# Altium PCB PCB1.PcbDoc
Units mm, origin at the board's own origin, x right, y up, seen from the top; angles counter-clockwise.
Board outline 55.63 x 70.87 mm, 2 copper layers (Top Layer, Bottom Layer); 17 components, 18 nets, 84 pads, 0 vias.
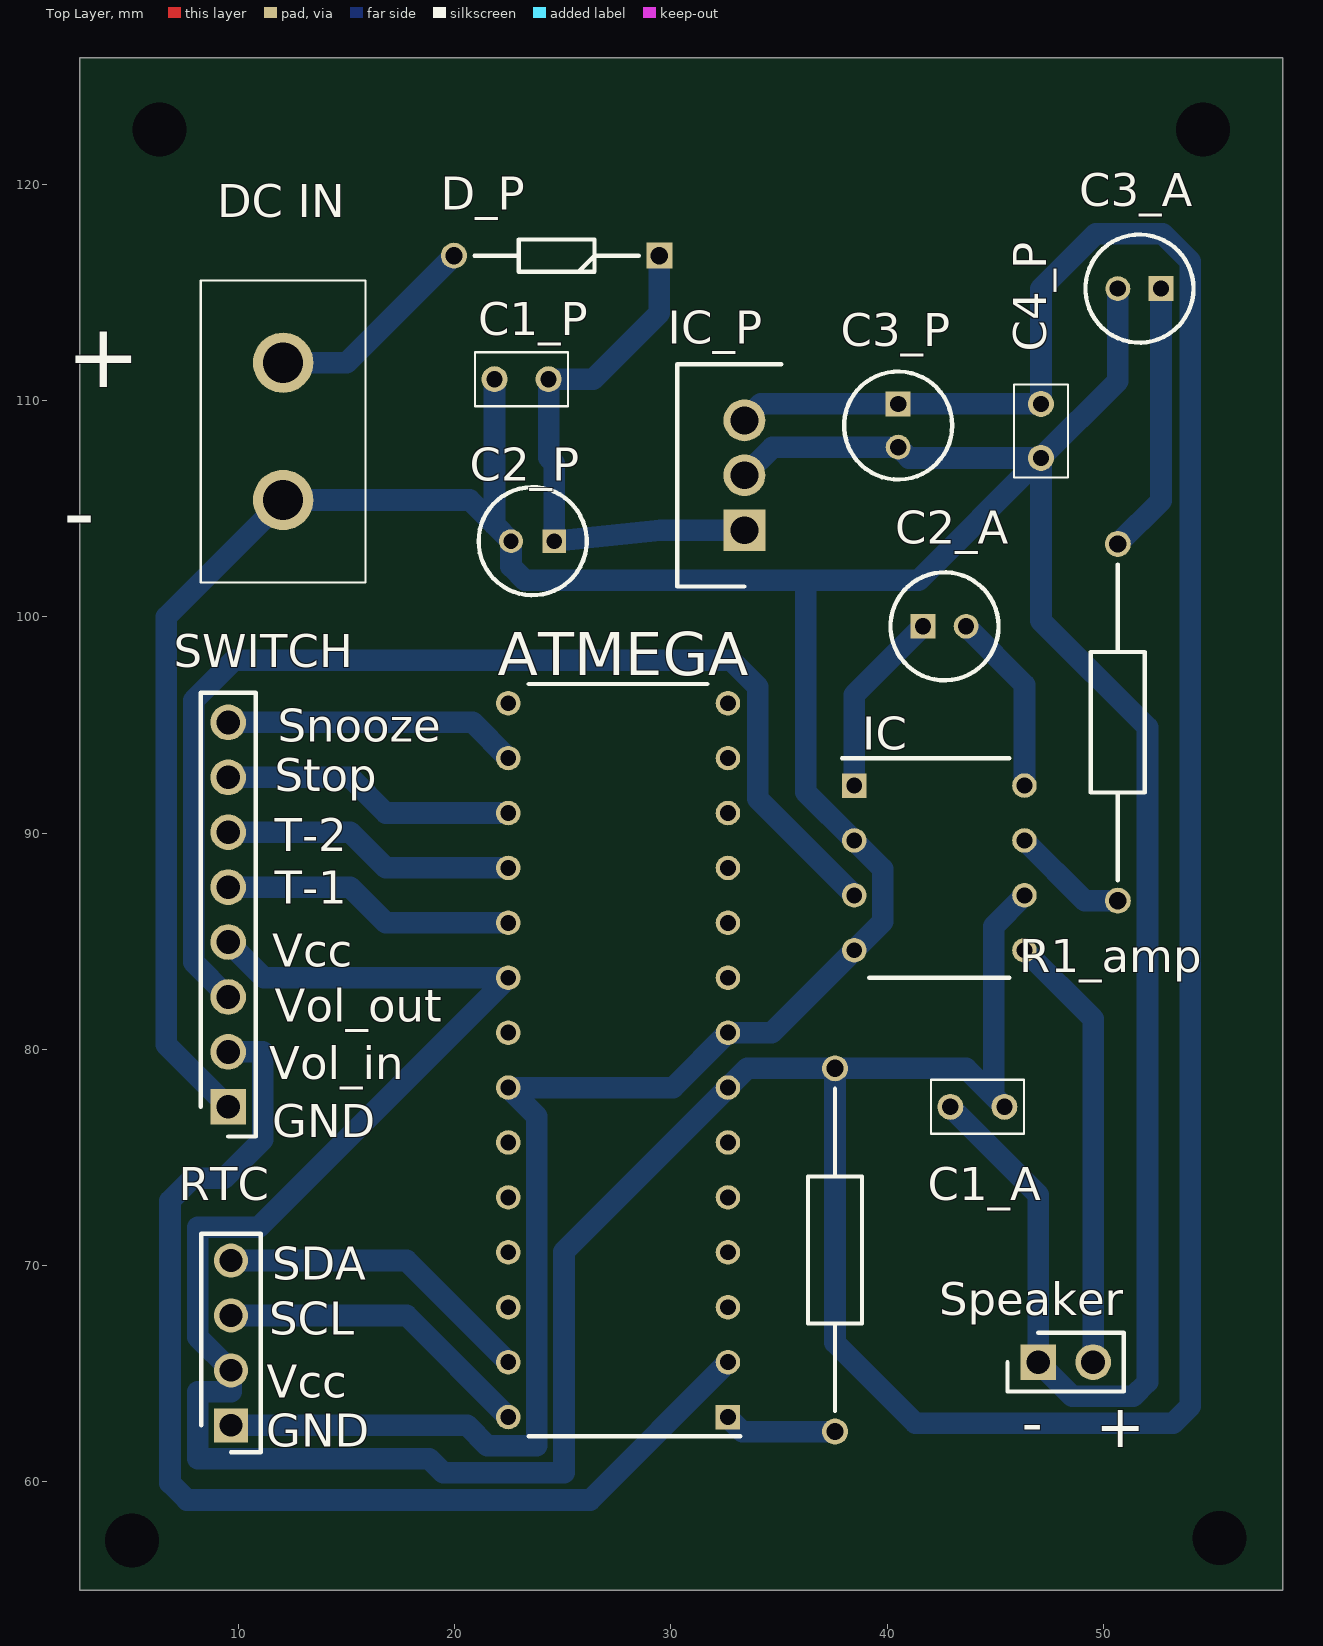
[diagram p0: Top Layer view]
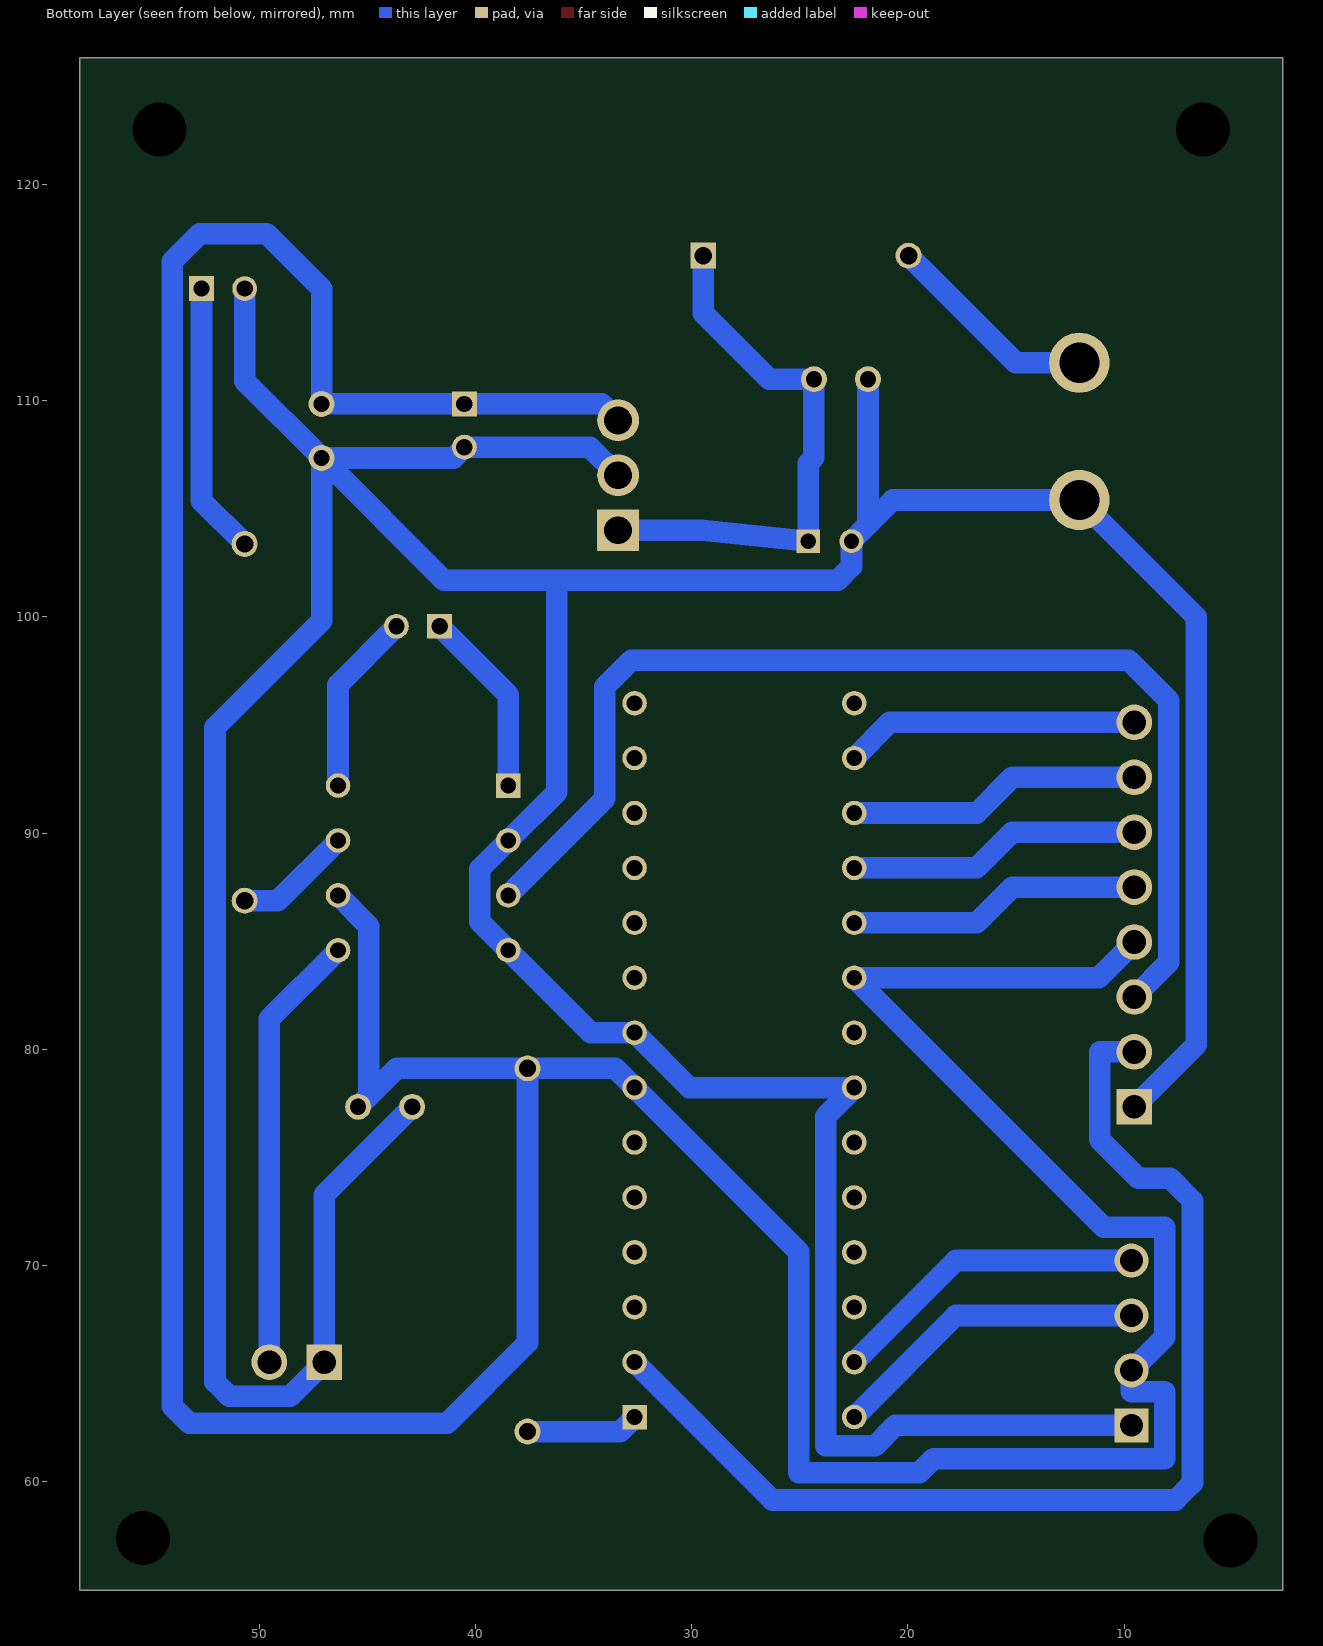
[diagram p1: Bottom Layer view, seen from below]
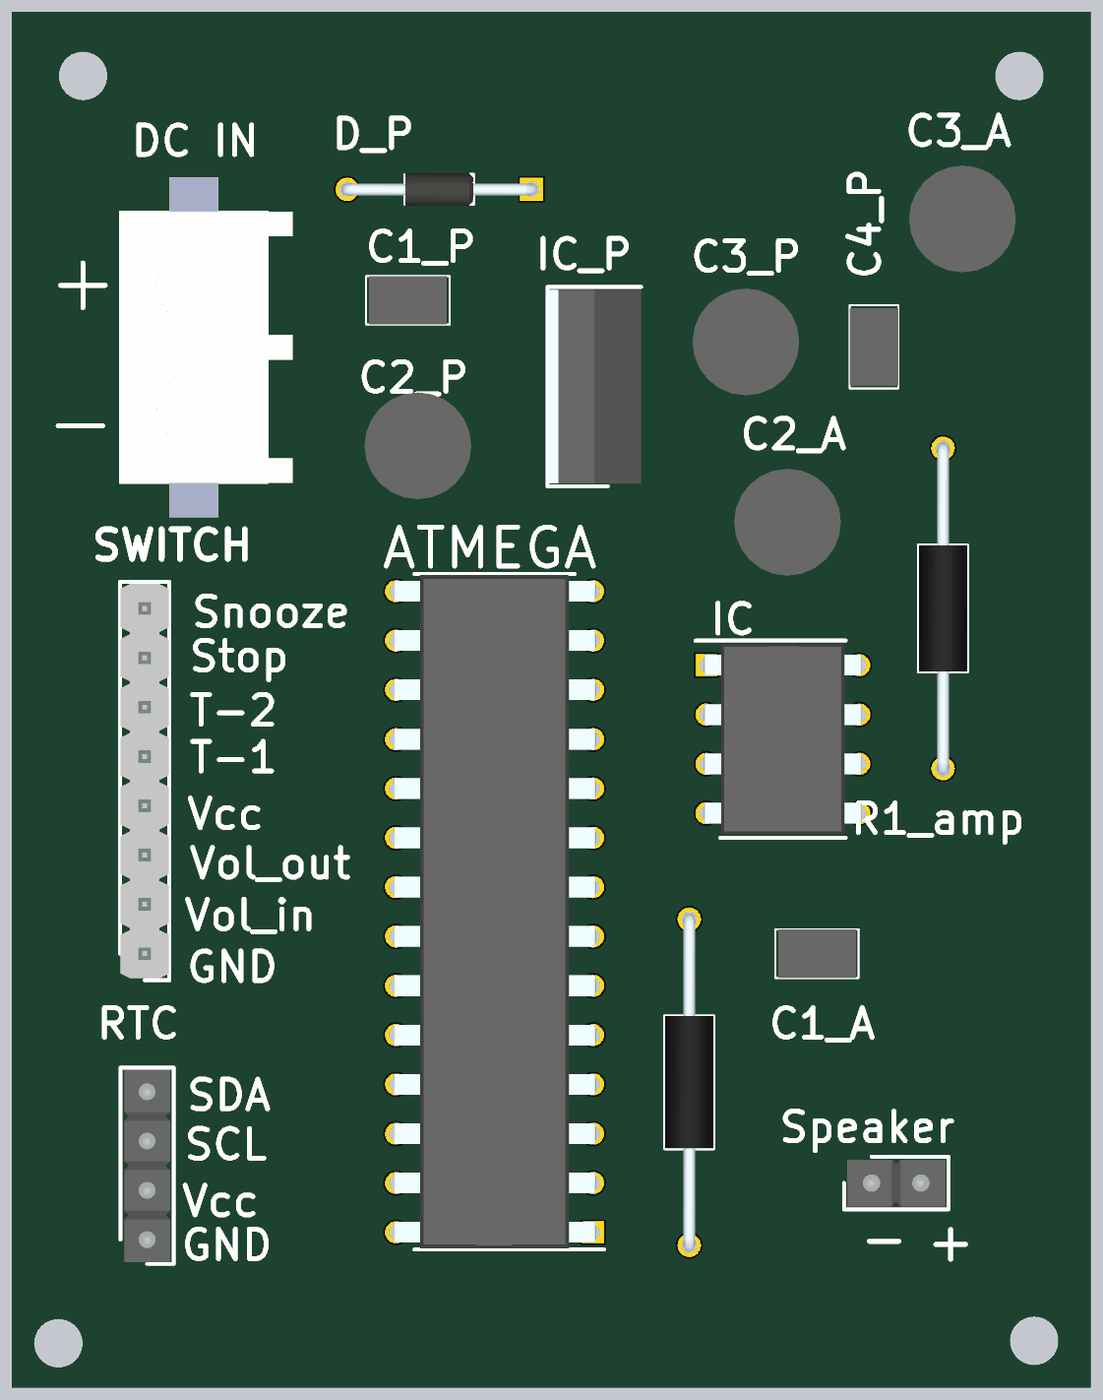
[diagram p2: 3D render of the assembled board from above, using the file's embedded part models]

## Layer stack, top to bottom
Top Solder: solder mask 0.0102, Solder Resist, Dk 3.5
Top Layer: signal copper 0.0356
Dielectric 1: dielectric 0.32, FR-4, Dk 4.8
Bottom Layer: signal copper 0.0356
Bottom Solder: solder mask 0.0102, Solder Resist, Dk 3.5

## Board outline
2.667,54.991 58.293,54.991 58.293,125.857 2.667,125.857

## Design rules (kind name [scope] priority, off if disabled: settings)
Clearance [All] p1: gap=0.254 ignorepadtopadclearanceinfootprint=FALSE except(0: Arc-Hole Track-Hole SMDPad-Hole THPad-Hole Via-Hole Fill-Hole Poly-Hole Region-Hole Text-Hole)
PolygonConnect [All] p1: connectstyle=Relief reliefconductorwidth=0.254 reliefentries=4 polygonreliefangle="90 Angle" airgapwidth=0.254
RoutingVias [All] p1: holewidth=0.711 width=1.27 viastyle="Through Hole" minholewidth=0.711 minwidth=1.27 maxholewidth=0.711 maxwidth=1.27
SolderMaskExpansion [All] p1: expansion=0.102 istentingtop=FALSE
Width [All] p1: maxlimit=2 minlimit=1 preferedwidth=1
30 further rules are at their usual default settings.

## Classes and differential pairs
component class Schematic_Alarm_tone: ATMEGA C1_A C1_P C2_A C2_P C3_A C3_P C4_P D_P "DC IN" IC IC_P R1_amp RTC Speaker SWITCH

## Components (designator, comment, footprint, x,y, rotation, side; value= is the part's Value field where it differs from the comment)
ATMEGA "ATMEGA328-PU" DIP1016W53P254L3468H457Q28N 27.559,79.502 r180 top (schematic designator ATMEGA328-PU)
C1_A "0.1uF" RCE5C1H103J1A2H03B 45.426,77.343 r180 top
C1_P "0.22uF" CAPPRD200W52D500H1250 24.606,103.505 r180 top
C2_A "10uF" CAPPRD200W55D500H1250 41.656,99.568 r0 top
C2_P "0.1uF" RCE5C1H103J1A2H03B 24.344,110.998 r180 top
C3_A "10uF" CAPPRD200W55D500H1250 52.673,115.189 r180 top
C3_P "10uF" CAPPRD200W55D500H1250 40.513,109.855 r270 top
C4_P "0.1uF" RCE5C1H103J1A2H03B 47.117,109.855 r270 top
D_P "SD103A-TR" DIOAD950W60L350D150 29.464,116.713 r180 top
"DC IN" "0010845020" 0010845020 12.065,105.41 r90 top
IC "LM386N" DIP787W53P254L982H508Q8N 42.418,88.392 r0 top
IC_P "7805" TO254P482X997X2018-3P 33.401,104.013 r90 top
R1_amp "10K" RESAD1650W60L650D250 50.673,86.878 r90 top
R1_reset "1K" RESAD1680W59L680D250 37.592,62.321 r90 top
RTC "0022032041" HDRV4W87P0X254_1X4_991X236X1155P 9.652,62.611 r90 top
Speaker "69190-402HLF" HDRV2W90P0X254_1X2_508X241X858P 46.99,65.532 r0 top
SWITCH "90120-0768" HDRV8W90P0X254_1X8_2032X249X560P 9.525,77.343 r90 top

## Footprints (in the part's own frame and the unit in brackets; to place one, negate y for a bottom-side part, rotate by r counter-clockwise, add the part's x,y. Pads: shape width x height; smd on the part's side, far side on the other; paste and mask are expansions set on the pad)
0010845020 [mm]
  round 2.79 hole 1.86: 1(0,0) 2(6.35,0)
  silkscreen extent -3.81,-3.81 10.16,3.81, body extent -5.59,-5.08 11.93,3.81, height 14.66
CAPPRD200W52D500H1250 [mm]
  rect 1.1x1.1 hole 0.7: 1(0,0)
  round 1.1 hole 0.7: 2(2,0)
  silkscreen extent -1.5,-2.5 3.5,2.5, body extent -1.75,-2.75 3.75,2.75, height 12.5
CAPPRD200W55D500H1250 [mm]
  rect 1.15x1.15 hole 0.75: 1(0,0)
  round 1.15 hole 0.75: 2(2,0)
  silkscreen extent -1.5,-2.5 3.5,2.5, body extent -1.75,-2.75 3.75,2.75, height 12.5
DIOAD950W60L350D150 [mm]
  rect 1.2x1.2 hole 0.8: 1(0,0)
  round 1.2 hole 0.8: 2(9.5,0)
  silkscreen extent 0.95,-0.75 8.55,0.75, body extent -0.3,-0.85 9.8,0.85, height 1.69
DIP787W53P254L982H508Q8N [mil]
  rect 44.61x44.61 hole 28.86: 1(-155,150)
  round 44.61 hole 28.86: 2(-155,50) 3(-155,-50) 4(-155,-150) 5(155,-150) 6(155,-50) 7(155,50) 8(155,150)
  silkscreen extent -177,-200 127,200, body extent -160,-193 160,193, height 200
DIP1016W53P254L3468H457Q28N [mm]
  rect 1.133x1.133 hole 0.733: 1(-5.08,16.51)
  round 1.133 hole 0.733: 2(-5.08,13.97) 3(-5.08,11.43) 4(-5.08,8.89) 5(-5.08,6.35) 6(-5.08,3.81) 7(-5.08,1.27) 8(-5.08,-1.27) 9(-5.08,-3.81) 10(-5.08,-6.35) 11(-5.08,-8.89) 12(-5.08,-11.43) 13(-5.08,-13.97) 14(-5.08,-16.51) 15(5.08,-16.51) 16(5.08,-13.97) 17(5.08,-11.43) 18(5.08,-8.89) 19(5.08,-6.35) 20(5.08,-3.81) 21(5.08,-1.27) 22(5.08,1.27) 23(5.08,3.81) 24(5.08,6.35) 25(5.08,8.89) 26(5.08,11.43) 27(5.08,13.97) 28(5.08,16.51)
  silkscreen extent -5.65,-17.4 4.13,17.4, body extent -5.21,-17.34 5.21,17.34, height 4.57
HDRV2W90P0X254_1X2_508X241X858P [mm]
  rect 1.65x1.65 hole 1.1: 1(0,0)
  round 1.65 hole 1.1: 2(2.54,0)
  silkscreen extent -1.42,-1.35 3.96,1.35, body extent -1.27,-1.2 3.81,1.2, height 8.58
HDRV4W87P0X254_1X4_991X236X1155P [mm]
  rect 1.575x1.575 hole 1.05: 1(0,0)
  round 1.575 hole 1.05: 2(2.54,0) 3(5.08,0) 4(7.62,0)
  silkscreen extent -1.25,-1.37 8.87,1.37, body extent -1.14,-1.18 8.76,1.18, height 11.55
HDRV8W90P0X254_1X8_2032X249X560P [mm]
  rect 1.65x1.65 hole 1.1: 1(0,0)
  round 1.65 hole 1.1: 2(2.54,0) 3(5.08,0) 4(7.62,0) 5(10.16,0) 6(12.7,0) 7(15.24,0) 8(17.78,0)
  silkscreen extent -1.37,-1.27 19.15,1.27, body extent -1.27,-1.25 19.05,1.25, height 9.29
RCE5C1H103J1A2H03B [mm]
  round 1.2 hole 0.75: 1(0,0) 2(2.5,0)
  silkscreen extent -0.9,-1.25 3.4,1.25, body extent -0.75,-1.25 3.25,1.25, height 5.1
RESAD1650W60L650D250 [mm]
  round 1.2 hole 0.8: 1(0,0) 2(16.5,0)
  silkscreen extent 0.95,-1.25 15.55,1.25, body extent -0.3,-1.25 16.8,1.25, height 2.49
RESAD1680W59L680D250 [mm]
  round 1.2 hole 0.8: 1(0,0) 2(16.8,0)
  silkscreen extent 0.95,-1.25 15.85,1.25, body extent -0.29,-1.25 17.1,1.25, height 2.49
TO254P482X997X2018-3P [mm]
  rect 1.935x1.935 hole 1.29: 1(0,0)
  round 1.935 hole 1.29: 2(2.54,0) 3(5.08,0)
  silkscreen extent -2.6,-1.71 7.68,3.11, body extent -2.44,-1.71 7.52,3.11, height 18.48

## Part data
ATMEGA: "Integrated Circuit", Manufacturer_Name=Microchip, Mouser Part Number=556-ATMEGA328-PU, Arrow Part Number=ATMEGA328-PU, Arrow Price/Stock=https://www.arrow.com/en/products/atmega328-pu/microchip-technology?region=europe, Datasheet Link=https://componentsearchengine.com/Datasheets/1/ATMEGA328-PU.pdf, Height=4.572mm, Manufacturer_Part_Number=ATMEGA328-PU, Mouser Price/Stock=https://www.mouser.co.uk/ProductDetail/Microchip-Technology-Atmel/ATMEGA328-PU?qs=lwdSMh1%2FoYJT8tfItQpQtA%3D%3D
C1_A C2_P C4_P: library part RDER71E104K0K1H03B, "Capacitor", Manufacturer_Name="Murata Electronics", Datasheet Link=https://psearch.en.murata.com/capacitor/product/RDER71E104K0K1H03B.html, Height=5mm, Manufacturer_Part_Number=RDER71E104K0K1H03B
C1_P: library part 860010772002, "Capacitor Polarised", Manufacturer_Name="Wurth Elektronik", Datasheet Link=https://componentsearchengine.com/Datasheets/1/860010772002.pdf, Height=12.5mm, Manufacturer_Part_Number=860010772002
C2_A C3_A C3_P: library part EEU-FR1H100, "Capacitor Polarised", Manufacturer_Name=Panasonic, Mouser2 Part Number=667-EEU-FR1H100, Datasheet Link=https://componentsearchengine.com//EEU-FR1H100.pdf, Height=12.5mm, Manufacturer_Part_Number=EEU-FR1H100, Mouser2 Price/Stock=https://www.mouser.com/Search/Refine.aspx?Keyword=667-EEU-FR1H100
D_P: "Schottky Diode", Manufacturer_Name=Vishay, Mouser2 Part Number=625-SD103A, Datasheet Link=https://componentsearchengine.com//SD103A-TR.pdf, Manufacturer_Part_Number=SD103A-TR, Mouser2 Price/Stock=https://www.mouser.com/Search/Refine.aspx?Keyword=625-SD103A
"DC IN" RTC: "Connector", Manufacturer_Name=Molex, Mouser Part Number=N/A
  "DC IN": Arrow Part Number=0010845020, Arrow Price/Stock=https://www.arrow.com/en/products/0010845020/molex, Datasheet Link=https://www.mouser.com/datasheet/2/276/0010845020_PCB_HEADERS-247555.pdf, Height=14.22mm, Manufacturer_Part_Number=0010845020, Mouser Price/Stock=https://www.mouser.com/Search/Refine.aspx?Keyword=N%2FA
  RTC: Arrow Part Number=0022032041, Arrow Price/Stock=https://www.arrow.com/en/products/0022032041/molex, Datasheet Link=http://www.molex.com/pdm_docs/sd/022032041_sd.pdf, Height=11.55mm, Manufacturer_Part_Number=0022032041, Mouser Price/Stock=https://www.mouser.co.uk/ProductDetail/Molex/0022032041?qs=PBcRNPEHKsrt5pJfEqGMHQ%3D%3D
IC: library part LM386N-4, "Integrated Circuit", Manufacturer_Name="Texas Instruments", Mouser Part Number=926-LM386N-4, Arrow Part Number=LM386N-4, Arrow Price/Stock=https://www.arrow.com/en/products/lm386n-4/texas-instruments, Datasheet Link=https://datasheet.datasheetarchive.com/originals/dk/DKDS-22/438053.pdf, Height=5.08mm, Manufacturer_Part_Number=LM386N-4, Mouser Price/Stock=https://www.mouser.com/Search/Refine.aspx?Keyword=926-LM386N-4
IC_P: library part MC7805CTG, "Integrated Circuit", Manufacturer_Name="ON Semiconductor", Mouser Part Number=863-MC7805CTG, Arrow Part Number=MC7805CTG, Arrow Price/Stock=https://www.arrow.com/en/products/mc7805ctg/on-semiconductor?region=asia, Datasheet Link=http://www.onsemi.com/pub/Collateral/MC7800-D.PDF, Height=4.82mm, Manufacturer_Part_Number=MC7805CTG, Mouser Price/Stock=https://www.mouser.co.uk/ProductDetail/ON-Semiconductor/MC7805CTG?qs=%252B9%2Fcbd0IE0SRQQJXyw%252B9hQ%3D%3D
R1_amp: library part MRS25000C1002FRP00, "Resistor", Manufacturer_Name=Vishay, Mouser Part Number=594-MRS2510K00F, Arrow Part Number=MRS25000C1002FRP00, Arrow Price/Stock=https://www.arrow.com/en/products/mrs25000c1002frp00/vishay?region=nac, Datasheet Link=http://www.vishay.com/docs/28724/mrs16m25.pdf, Manufacturer_Part_Number=MRS25000C1002FRP00, Mouser Price/Stock=https://www.mouser.co.uk/ProductDetail/Vishay-BC-Components/MRS25000C1002FRP00?qs=BLrwpM7T1TlvU75Y03Sdyg%3D%3D
R1_reset: library part MF25_1K2, "Resistor", Manufacturer_Name=MULTICOMP, Manufacturer_Part_Number="MF25 1K2", Datasheet Link="https://componentsearchengine.com/Datasheets/2/MF25 1K2.pdf"
Speaker: "Connector", Manufacturer_Name=Amphenol, Mouser Part Number=649-69190-402HLF, Arrow Part Number=69190-402HLF, Arrow Price/Stock=https://www.arrow.com/en/products/69190-402hlf/amphenol-fci?region=nac, Datasheet Link=https://cdn.amphenol-icc.com/media/wysiwyg/files/drawing/69190.pdf, Height=8.58mm, Manufacturer_Part_Number=69190-402HLF, Mouser Price/Stock=https://www.mouser.co.uk/ProductDetail/Amphenol-FCI/69190-402HLF?qs=FG09h9tFCuBmxnxtT7pYzA%3D%3D
SWITCH: "Connector", Manufacturer_Name=Molex, Mouser Part Number=538-90120-0768, Arrow Part Number=90120-0768, Arrow Price/Stock=http://www.arrow.com/en/products/90120-0768/molex, Datasheet Link=http://www.molex.com/molex/products/datasheet.jsp?part=active/0901200768_PCB_HEADERS.xml, Height=5.6mm, Manufacturer_Part_Number=90120-0768, Mouser Price/Stock=https://www.mouser.co.uk/ProductDetail/Molex/90120-0768?qs=PvP5v7EimsmChj6ovxYE3w%3D%3D

## Free pads (board coordinates)
  oval 1.6x0.55 hole 2 unplated mask+0.1: 34(6.35,122.555) 36(6.35,122.555)
  oval 1.6x0.55 hole 2.5 unplated mask+0.1: 35(6.35,122.555) 40(5.08,57.277) 41(54.61,122.555) 47(55.372,57.404)
  rect 1.6x0.55 on Top Overlay mask+0.1: 37(5.08,57.277) 38(5.08,57.277) 39(5.08,57.277)

## Nets (pads, with @x,y where several pads share a name; then routed paths per layer and width w, separated by ;. In a path a pad name is that pad's centre, name@x,y a point inside that pad or via, vN(x,y) a via of type N, cw(c..) or ccw(c..) an arc to the next point about the centre after c; other vN are vias at no path point)
+12: C1_P.1 C2_P.1 D_P.1 IC_P.1 | length 25.5
  Bottom Layer w1: D_P.1 29.464,114.046 26.416,110.998 C2_P.1 24.344,107.374 24.606,107.112 C1_P.1 29.515,104.013 IC_P.1
GND: "DC IN.1" ATMEGA.8 ATMEGA.22 C1_A.2 C1_P.2 C2_P.2 C3_A.2 C3_P.2 C4_P.2 IC.2 IC.4 IC_P.2 RTC.1 Speaker.1 SWITCH.1 | length 235.3
  Bottom Layer w1: SWITCH.1 6.655,80.213 6.655,100 12.065,105.41 20.701,105.41 21.844,104.267 ; RTC.1 20.574,62.611 21.514,61.671 23.8,61.671 23.8,76.911 ATMEGA.22 30.099,78.232 ATMEGA.8 34.671,80.772 IC.4 39.802,85.903 39.802,88.341 IC.2 36.246,91.897 36.246,101.702 ; C2_P.2 21.844,104.267 ; IC_P.2 34.703,107.855 C3_P.2 41.013,107.355 C4_P.2 ; C1_A.2 46.99,73.279 Speaker.1 48.569,63.953 51.384,63.953 52.045,64.613 52.045,94.894 47.117,99.822 C4_P.2 ; C3_A.2 50.673,110.911 C4_P.2 ; 21.844,104.267 C1_P.2 22.606,102.337 23.241,101.702 36.246,101.702 ; 36.246,101.702 41.464,101.702 C4_P.2
LED: ATMEGA.7 ATMEGA.20 C1_A.1 C3_P.1 C4_P.1 IC.6 IC_P.3 R1_reset.2 RTC.2 SWITCH.4 | length 219.4
  Bottom Layer w1: SWITCH.4 11.176,83.312 ATMEGA.20 10.94,71.773 8.11,71.773 8.11,66.693 RTC.2 9.652,64.16 8.11,64.16 8.11,61.069 18.817,61.069 19.469,60.417 25.054,60.417 25.054,70.647 ATMEGA.7 33.528,79.121 R1_reset.2 ; IC_P.3 34.163,109.855 C3_P.1 C4_P.1 47.117,115.189 49.657,117.729 52.756,117.729 54.026,116.459 54.026,63.489 53.236,62.699 41.314,62.699 37.592,66.421 R1_reset.2 ; C1_A.1 44.933,77.836 ; IC.6 44.933,85.7 44.933,77.836 ; R1_reset.2 43.648,79.121 44.933,77.836
NetATMEGA328-PU_1: ATMEGA.1 R1_reset.1 | length 5.2
  Bottom Layer w1: ATMEGA.1 33.31,62.321 R1_reset.1
NetATMEGA328-PU_27: ATMEGA.27 RTC.4 | length 14.8
  Bottom Layer w1: RTC.4 17.78,70.231 ATMEGA.27
NetATMEGA328-PU_28: ATMEGA.28 RTC.3 | length 14.8
  Bottom Layer w1: RTC.3 17.78,67.691 ATMEGA.28
NetC2_A_1: C2_A.1 IC.1 | length 8.7
  Bottom Layer w1: IC.1 38.481,96.393 C2_A.1
NetC2_A_2: C2_A.2 IC.8 | length 8.5
  Bottom Layer w1: C2_A.2 46.355,96.869 IC.8
NetC3_A_1: C3_A.1 R1_amp.2 | length 12.6
  Bottom Layer w1: R1_amp.2 52.673,105.378 C3_A.1
NetD_P_2: "DC IN.2" D_P.2 | length 10
  Bottom Layer w1: 12.065,111.76 15.011,111.76 D_P.2
NetIC_5: IC.5 Speaker.2 | length 20.4
  Bottom Layer w1: IC.5 49.53,81.407 Speaker.2
NetIC_7: IC.7 R1_amp.1 | length 5.5
  Bottom Layer w1: IC.7 49.139,86.878 R1_amp.1
Snooze: ATMEGA.16 SWITCH.8 | length 13.6
  Bottom Layer w1: SWITCH.8 20.828,95.123 ATMEGA.16
Speaker: ATMEGA.2 SWITCH.2 | length 53
  Bottom Layer w1: SWITCH.2 11.125,79.883 11.125,75.819 9.347,74.041 7.871,74.041 6.833,73.003 6.833,59.944 7.62,59.157 26.264,59.157 ATMEGA.2
STOP: ATMEGA.17 SWITCH.7 | length 13.6
  Bottom Layer w1: SWITCH.7 15.164,92.583 16.815,90.932 ATMEGA.17
T1: ATMEGA.19 SWITCH.5 | length 13.6
  Bottom Layer w1: SWITCH.5 15.164,87.503 16.815,85.852 ATMEGA.19
T2: ATMEGA.18 SWITCH.6 | length 13.6
  Bottom Layer w1: SWITCH.6 15.164,90.043 16.815,88.392 ATMEGA.18
Vol_Out: IC.3 SWITCH.3 | length 53.2
  Bottom Layer w1: SWITCH.3 7.925,84.023 7.925,96.139 9.779,97.993 32.791,97.993 34.011,96.774 34.011,91.592 IC.3
pads on no net: ATMEGA.3 ATMEGA.4 ATMEGA.5 ATMEGA.6 ATMEGA.9 ATMEGA.10 ATMEGA.11 ATMEGA.12 ATMEGA.13 ATMEGA.14 ATMEGA.15 ATMEGA.21 ATMEGA.23 ATMEGA.24 ATMEGA.25 ATMEGA.26

## Silkscreen, mask and mechanical layers (free items; w line width, h text height)
Top Overlay:
  text "+" at 2.032,110.617 h3
  text "-" at 1.905,103.378 h3
  text "Snooze" at 11.811,94.234 h1.52
  text "Stop" at 11.684,91.948 h1.52
  text "T-2" at 11.684,89.154 h1.52
  text "T-1" at 11.684,86.741 h1.52
  text "Vcc" at 11.557,83.82 h1.52
  text "Vol_out" at 11.684,81.28 h1.52
  text "Vol_in" at 11.43,78.613 h1.52
  text "GND" at 11.557,75.946 h1.52
  text "SDA" at 11.557,69.342 h1.52
  text "SCL" at 11.43,66.802 h1.52
  text "Vcc" at 11.303,63.881 h1.52
  text "-" at 46.228,61.754 h2
  text "GND" at 11.276,61.62 h1.52
  text "+" at 49.657,61.595 h2